# Altium PCB SMT 2inch printer V01 260904.PcbDoc
Units mil, origin at the board's own origin, x right, y up, seen from the top; angles counter-clockwise.
Board outline 2278.2 x 1816 mil, 2 copper layers (Top Layer, Bottom Layer); 60 components, 55 nets, 229 pads, 137 vias.
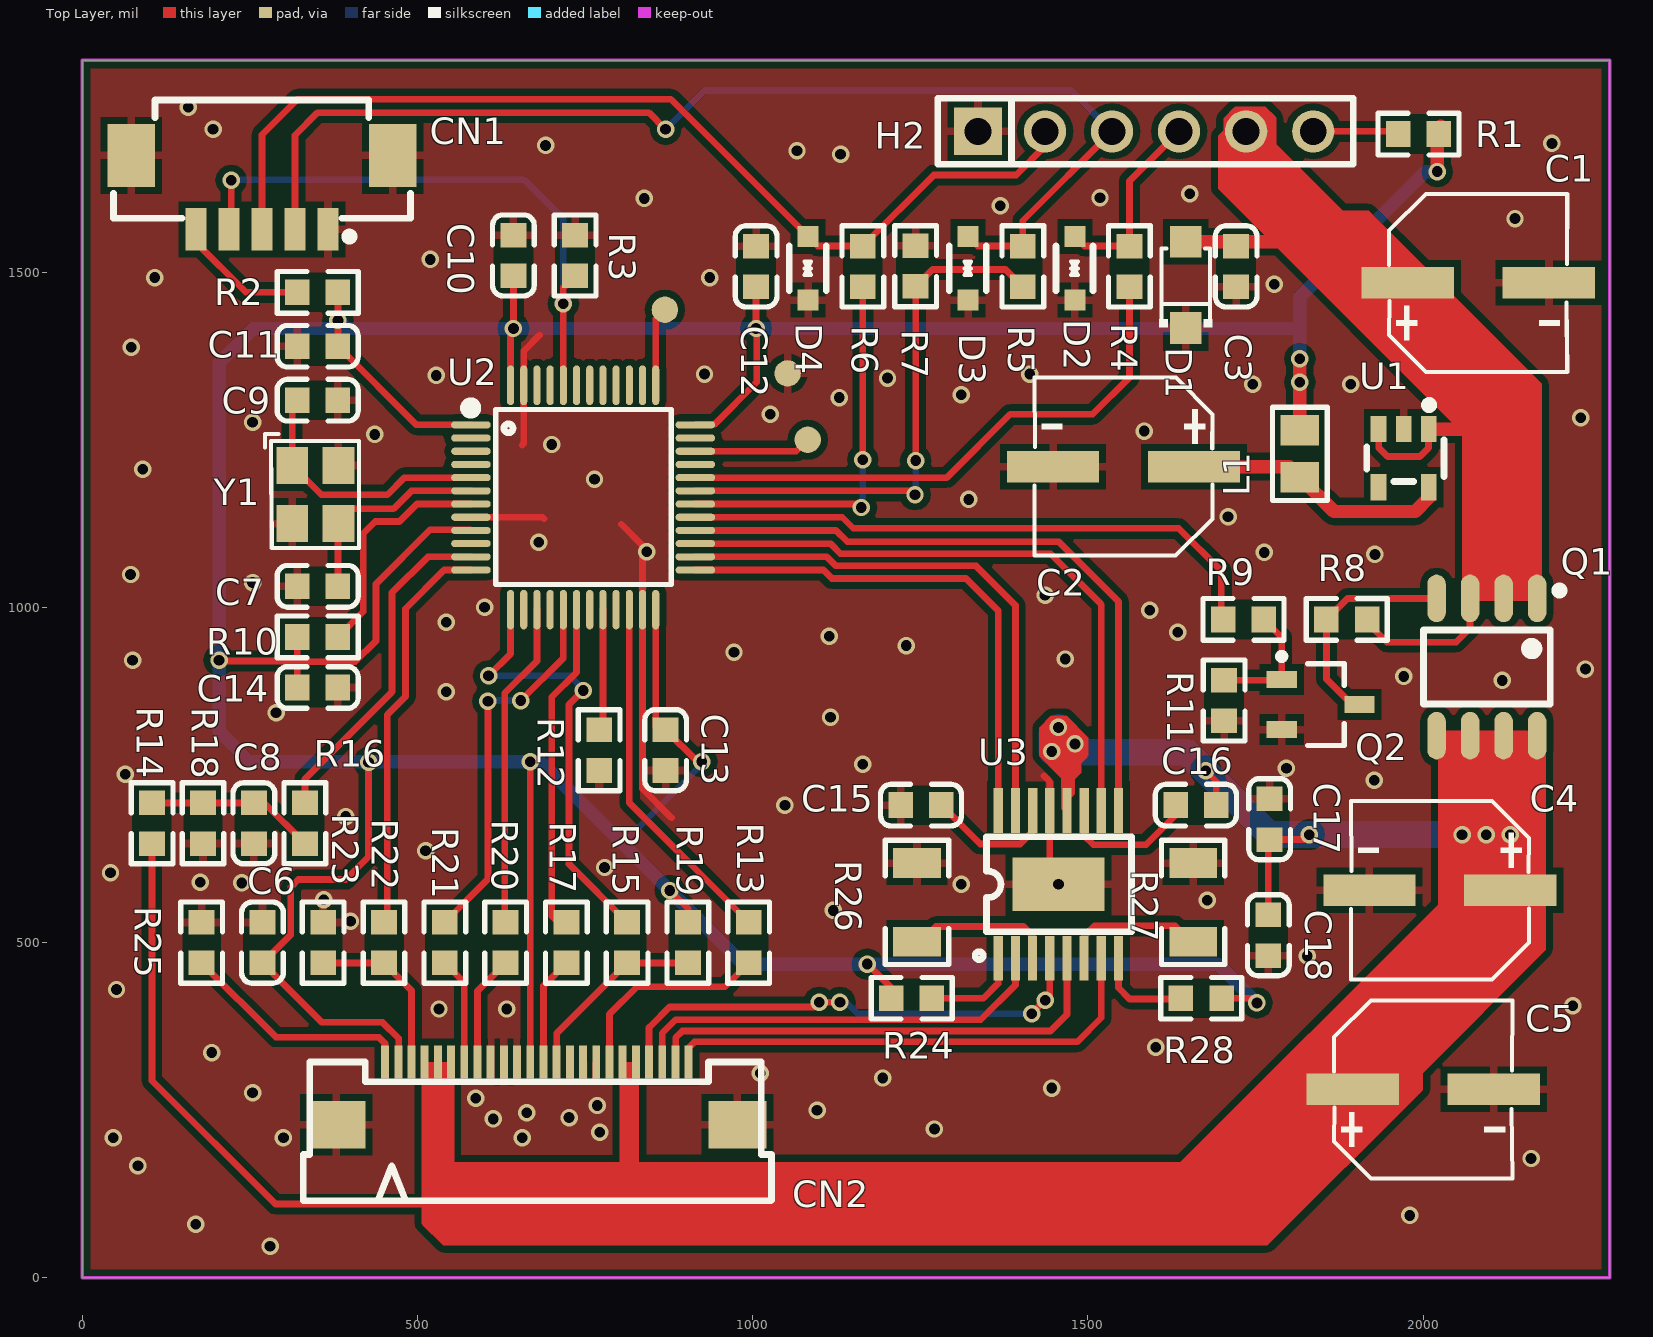
[diagram p0: Top Layer view]
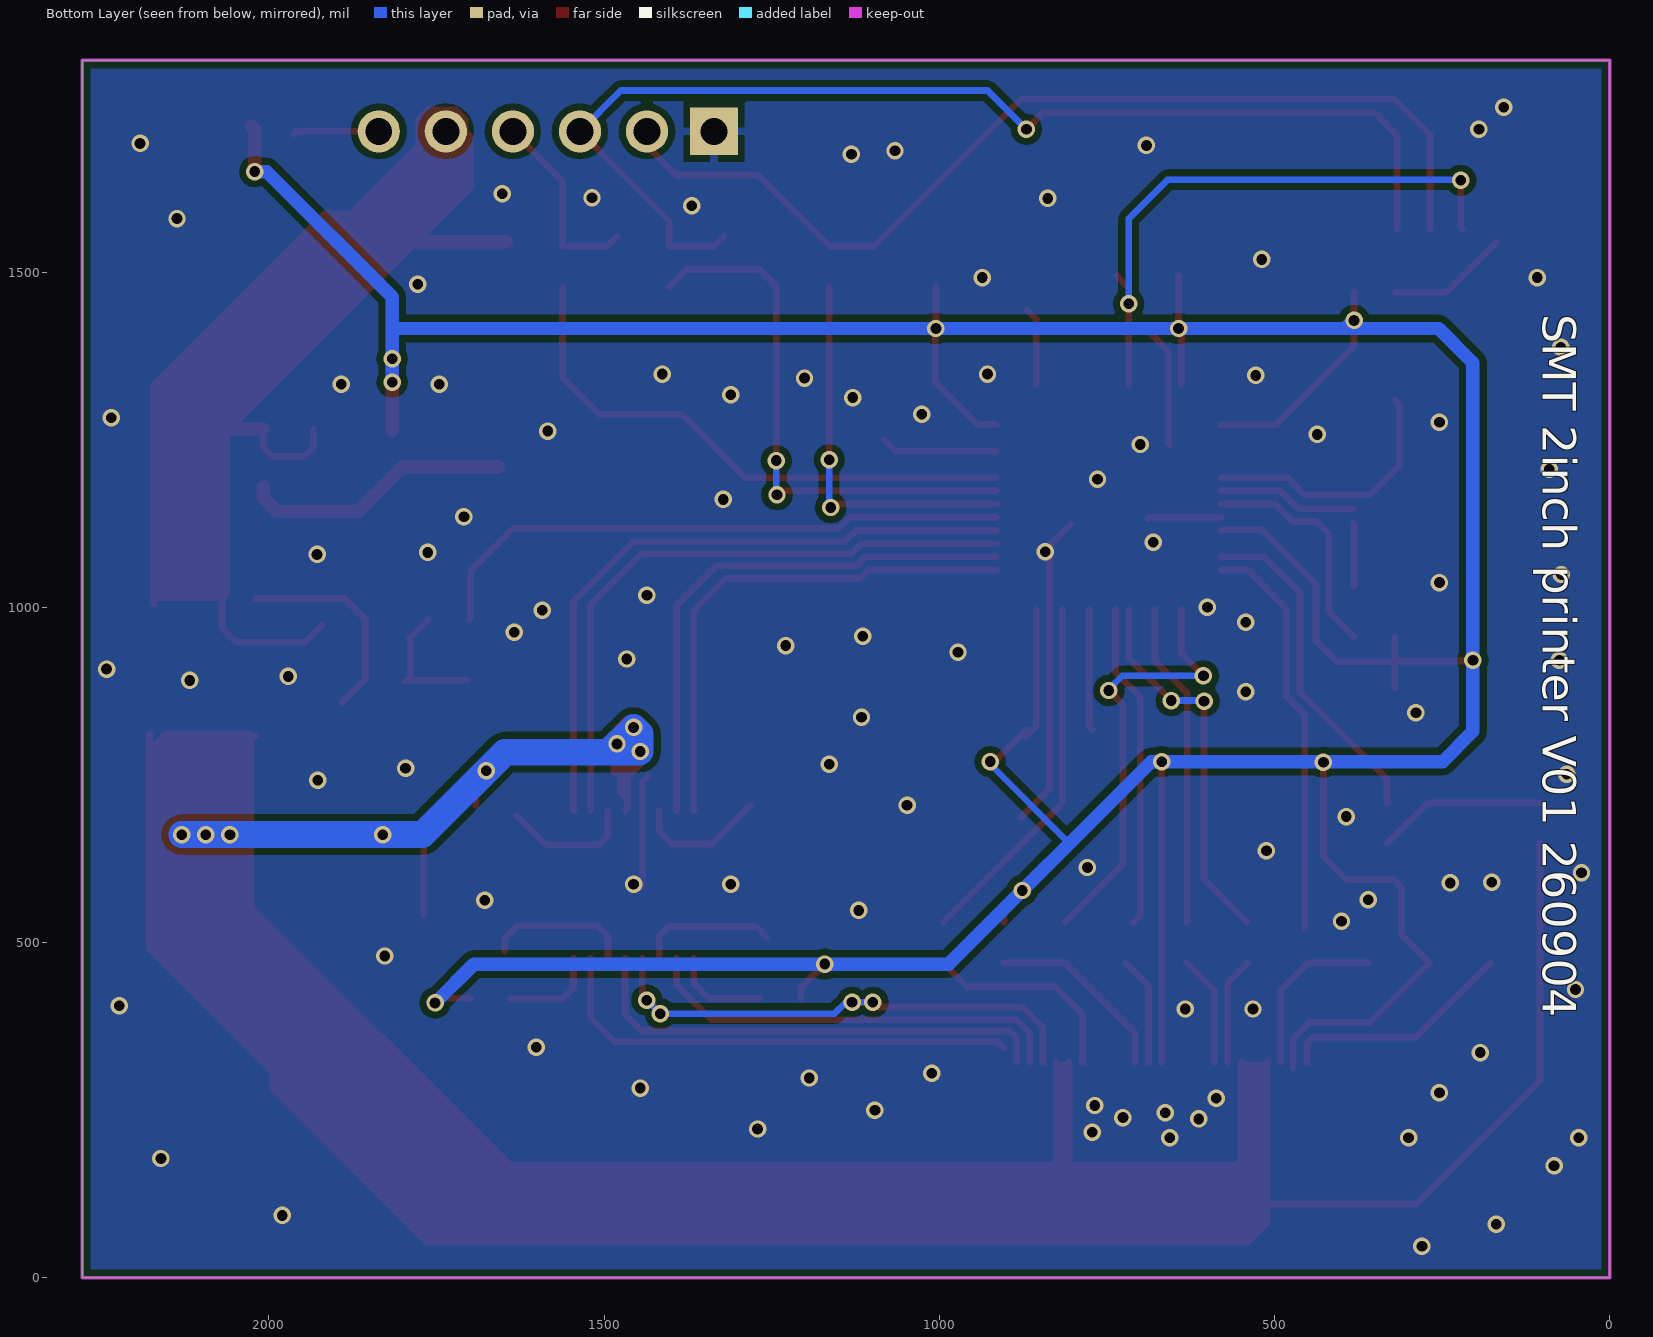
[diagram p1: Bottom Layer view, seen from below]

## Layer stack, top to bottom
Top Layer: signal copper 1.4
Dielectric: dielectric 12.6, FR-4, Dk 4.8
Bottom Layer: signal copper 1.4

## Board outline
0,0 2278.2,0 2278.2,1816 0,1816

## Design rules (kind name [scope] priority, off if disabled: settings)
Clearance Clearance_1 [All vs InNet('GND')] p1: gap=10
Clearance [All] p2: gap=6
ComponentClearance [All] p1 off: gap=10 collisioncheckmode=3 verticalgap=10
DiffPairsRouting DiffPair_DiffPairsRouting [InDifferentialPair ('NewDifferentialPair1')] p1: maxlimit=10 minlimit=10 mostfreqgap=10 maxuncoupledlength=500
DiffPairsRouting DiffPair_DiffPairsRouting_1 [InDifferentialPair ('NewDifferentialPair1')] p2: maxlimit=5 minlimit=5 mostfreqgap=5 maxuncoupledlength=500
DiffPairsRouting DiffPair_DiffPairsRouting_2 [InDifferentialPair ('NewDifferentialPair1')] p3: maxlimit=10 minlimit=10 mostfreqgap=10 maxuncoupledlength=500
DiffPairsRouting DiffPairsRouting_2 [InDifferentialPair ('NewDifferentialPair1')] p4: maxlimit=10 minlimit=10 mostfreqgap=10 maxuncoupledlength=500
DiffPairsRouting DiffPair_DiffPairsRouting_3 [InDifferentialPair ('NewDifferentialPair1')] p5: maxlimit=10 minlimit=10 mostfreqgap=10 maxuncoupledlength=500
DiffPairsRouting DiffPairsRouting_1 [InDifferentialPair ('NewDifferentialPair1')] p6: maxlimit=10 minlimit=10 mostfreqgap=10 maxuncoupledlength=500
DiffPairsRouting [All] p7: maxlimit=10 minlimit=10 mostfreqgap=10 maxuncoupledlength=500
MatchedLengths DiffPair_MatchedLengths [InDifferentialPair ('NewDifferentialPair1')] p1: tolerance=10000 checknetsindiffpair=TRUE checkdiffpairvsdiffpair=TRUE checkothers=TRUE
MatchedLengths DiffPair_MatchedLengths_1 [InDifferentialPair ('NewDifferentialPair1')] p2: tolerance=10000 checknetsindiffpair=TRUE checkdiffpairvsdiffpair=TRUE checkothers=TRUE
MatchedLengths DiffPair_MatchedLengths_2 [InDifferentialPair ('NewDifferentialPair1')] p3: tolerance=10000 checknetsindiffpair=TRUE checkdiffpairvsdiffpair=TRUE checkothers=TRUE
MatchedLengths MatchedLengths_1 [InDifferentialPair ('NewDifferentialPair1')] p4: tolerance=1000 checknetsindiffpair=TRUE checkdiffpairvsdiffpair=TRUE checkothers=TRUE
MatchedLengths DiffPair_MatchedLengths_3 [InDifferentialPair ('NewDifferentialPair1')] p5: tolerance=10000 checknetsindiffpair=TRUE checkdiffpairvsdiffpair=TRUE checkothers=TRUE
MatchedLengths [InDifferentialPair ('NewDifferentialPair1')] p6: tolerance=1000 checknetsindiffpair=TRUE checkdiffpairvsdiffpair=TRUE checkothers=TRUE
PolygonConnect PolygonConnect_1 [InNet('GND') vs IsVia] p1: connectstyle=Direct reliefconductorwidth=10 reliefentries=4 polygonreliefangle="90 Angle"
PolygonConnect [All] p2: connectstyle=Relief reliefconductorwidth=12 reliefentries=4 polygonreliefangle="90 Angle"
RoutingVias [All] p1: holewidth=16 width=26 viastyle="Through Hole" minholewidth=16 minwidth=24 maxholewidth=50 maxwidth=100
SolderMaskExpansion [All] p1: expansion=4
TestPointUsage [All] p1: valid=0 allowmultiple=FALSE
Testpoint [All] p1: side=15 testpointundercomponent=TRUE minsize=40 maxsize=100 preferedsize=60 minholesize=0 maxholesize=40 preferedholesize=32 testpointgrid=1 style=1023 order=0123456789
Width DiffPair_Width [InDifferentialPair('NewDifferentialPair1')] p1: maxlimit=5 minlimit=5 preferedwidth=5
Width DiffPair_Width_1 [InDifferentialPair('NewDifferentialPair1')] p2: maxlimit=5 minlimit=5 preferedwidth=5
Width DiffPair_Width_2 [InDifferentialPair('NewDifferentialPair1')] p3: maxlimit=5 minlimit=5 preferedwidth=5
Width Width_2 [InDifferentialPair('NewDifferentialPair1')] p4: maxlimit=10 minlimit=10 preferedwidth=10
Width DiffPair_Width_3 [InDifferentialPair('NewDifferentialPair1')] p5: maxlimit=5 minlimit=5 preferedwidth=5
Width Width_1 [InDifferentialPair('NewDifferentialPair1')] p6: maxlimit=10 minlimit=10 preferedwidth=10
Width [All] p7: maxlimit=100 minlimit=2 preferedwidth=6
17 further rules are at their usual default settings.

## Components (designator, comment, footprint, x,y, rotation, side; value= is the part's Value field where it differs from the comment)
C1 "47uF" CAP-SMD_BD6.3-L6.6-W6.6-FD 2082,1484 r0 top
C2 "47uF" CAP-SMD_BD6.3-L6.6-W6.6-FD 1553,1210 r180 top
C3 "100nF" 0603_C 1721,1508.62 r270 top
C4 "100uF" CAP-SMD_BD6.3-L6.6-W6.6-FD 2025,578 r180 top
C5 "100uF" CAP-SMD_BD6.3-L6.6-W6.6-FD 2000,281 r0 top
C6 "100nF" 0603_C 268.67,500 r270 top
C7 "20pF" 0603_C 351,1031.5 r0 top
C8 "470pF" 0603_C 256,678 r90 top
C9 "20pF" 0603_C 351,1309 r180 top
C10 "100nF" 0603_C 643,1525 r270 top
C11 "100nF" 0603_C 351,1389.5 r0 top
C12 "100nF" 0603_C 1005,1508.62 r270 top
C13 "100nF" 0603_C 870,787 r90 top
C14 "100nF" 0603_C 351,880.5 r180 top
C15 "2.2uF" 0603_C 1251,705 r180 top
C16 "10nF" 0603_C 1661,705 r0 top
C17 "10uF" 0603_C 1771,684 r270 top
C18 "100nF" 0603_C 1769,511 r90 top
CN1 "mx1.25mm-5p-wt" CONN-SMD_5P-P1.25_MX1.25MM-5P-WT 268,1619 r180 top
CN2 "24P05/上接" FPC-SMD_24P-P0.50_F0500WR-S-24PNLNG1GB0R 678,275 r0 top
D1 "SMF6.0A" SOD-123FL_L2.7-W1.8-LS3.8-RD 1645.87,1481 r90 top
D2 "H5VLD3B" SOD-323_L1.7-W1.3-LS2.5-BI 1480.39,1505.84 r90 top
D3 "H5VLD3B" SOD-323_L1.7-W1.3-LS2.5-BI 1321.28,1505.84 r90 top
D4 "H5VLD3B" SOD-323_L1.7-W1.3-LS2.5-BI 1082.62,1505.84 r90 top
H2 "lail-pz2.54-6p-l" HDR-TH_6P-P2.54-V-F 1586,1710 r0 top
L1 "BLM18AG601SN1D" 0805_L 1816,1229 r90 top
Q1 "NCE30P12S" SOIC-8_150mil 2095,911 r180 top
Q2 "AO3402" SOT-23-3L 1847,855 r180 top
R1 "10KΩ" 0603_R 1993,1706 r0 top
R2 "1KΩ" 0603_R 351,1470 r0 top
R3 "10KΩ" 0603_R 735,1525 r90 top
R4 "20Ω" 0603_R 1561.89,1508.62 r270 top
R5 "20Ω" 0603_R 1402.78,1508.62 r270 top
R6 "20Ω" 0603_R 1164.11,1508.62 r270 top
R7 "10KΩ" 0603_R 1243,1509 r270 top
R8 "47KΩ" 0603_R 1886,982 r0 top
R9 "1KΩ" 0603_R 1732,982 r180 top
R10 "10KΩ" 0603_R 351,956 r0 top
R11 "47KΩ" 0603_R 1703,861 r270 top
R12 "10KΩ" 0603_R 771,787 r90 top
R13 "100Ω" 0603_R 994,500 r90 top
R14 "47KΩ" 0603_R 104,678 r90 top
R15 "100Ω" 0603_R 812.67,500 r90 top
R16 "1KΩ" 0603_R 332,678 r270 top
R17 "100Ω" 0603_R 722,500 r90 top
R18 "47KΩ" 0603_R 180,678 r270 top
R19 "56KΩ" 0603_R 903.33,500 r90 top
R20 "100Ω" 0603_R 631.33,500 r90 top
R21 "100Ω" 0603_R 540.67,500 r90 top
R22 "100Ω" 0603_R 450,500 r90 top
R23 "30KΩ" 0603_R 359.33,500 r90 top
R24 "10KΩ" 0603_R 1237,417 r180 top
R25 "220Ω" 0603_R 178,500 r270 top
R26 "0.4Ω 1%" 1206_R 1245,560 r90 top
R27 "0.4Ω 1%" 1206_R 1657,560 r90 top
R28 "10KΩ" 0603_R 1669,417 r0 top
U1 "TLV75733PDBVR" SOT-23-5 1976,1231 r90 top
U2 "MH2103CCCT6" LQFP-48_L7.0-W7.0-P0.50-LS9.0-BL 747,1164 r270 top locked
U3 "PT5139-HT-TP" HTSSOP-16_L5.0-W4.4-P0.65-LS6.4-BL-EP 1456,587 r0 top
Y1 "8MHz" XT_3225_4 337.56,1178.31 r270 top

## Footprints (in the part's own frame and the unit in brackets; to place one, negate y for a bottom-side part, rotate by r counter-clockwise, add the part's x,y. Pads: shape width x height; smd on the part's side, far side on the other; paste and mask are expansions set on the pad)
0603_C [mm]
  rect 0.93x0.98 smd: 1(-0.77,0) 2(0.77,0)
  silkscreen extent -1.53,-0.79 1.54,0.79, body extent -0.8,-0.4 0.8,0.4, height 0.3
0603_R [mm]
  rect 0.93x0.98 smd: 1(-0.77,0) 2(0.77,0)
  silkscreen extent -1.53,-0.79 1.54,0.79, body extent -0.85,-0.4 0.85,0.4, height 0.56
0805_L [mm]
  rect 1.16x1.47 smd: 1(-0.89,0) 2(0.89,0)
  silkscreen extent -1.77,-1.04 1.77,1.03, body extent -1.02,-0.64 1.03,0.64, height 0.6
1206_R [mm]
  rect 1.13x1.8 smd: 1(-1.49,0) 2(1.49,0)
  silkscreen extent -2.36,-1.2 2.35,1.2, body extent -1.7,-0.86 1.65,0.87, height 0.85
CAP-SMD_BD6.3-L6.6-W6.6-FD [mil]
  rect 137.8x47.2 smd: 1(-105.1,0) 2(105.1,0)
  silkscreen extent -133,-133 133,133
CONN-SMD_5P-P1.25_MX1.25MM-5P-WT [mm]
  rect 0.8x1.6 smd: 1(-2.5,1.4) 2(-1.25,1.4) 3(0,1.4) 4(1.25,1.4) 5(2.5,1.4)
  rect 1.8x2.4 smd: 6(4.95,-1.4) 7(-4.95,-1.4)
  silkscreen extent -5.63,-3.5 5.63,1.82
FPC-SMD_24P-P0.50_F0500WR-S-24PNLNG1GB0R [mm]
  rect 0.3x1.25 smd: 1(-5.75,1.187) 2(-5.25,1.187) 3(-4.75,1.187) 4(-4.25,1.187) 5(-3.75,1.187) 6(-3.25,1.187) 7(-2.75,1.187) 8(-2.25,1.187) 9(-1.75,1.187) 10(-1.25,1.187) 11(-0.75,1.187) 12(-0.25,1.187) 13(0.25,1.187) 14(0.75,1.187) 15(1.25,1.187) 16(1.75,1.187) 17(2.25,1.187) 18(2.75,1.187) 19(3.25,1.187) 20(3.75,1.187) 21(4.25,1.187) 22(4.75,1.187) 23(5.25,1.187) 24(5.75,1.187)
  rect 2.202x1.798 smd: 25(7.6,-1.187) 26(-7.6,-1.187)
  silkscreen extent -8.85,-4.06 8.89,1.19
HDR-TH_6P-P2.54-V-F [mm]
  rect 1.8x1.8 hole 1.02: 1(-6.35,0)
  round 1.6 hole 1.02: 2(-3.81,0) 3(-1.27,0) 4(1.27,0) 5(3.81,0) 6(6.35,0)
  silkscreen extent -7.87,-1.25 7.87,1.25
HTSSOP-16_L5.0-W4.4-P0.65-LS6.4-BL-EP [mm]
  rect 0.35x1.7 smd: 1(-2.28,-2.804) 2(-1.629,-2.804) 3(-0.979,-2.804) 4(-0.329,-2.804) 5(0.321,-2.804) 6(0.971,-2.804) 7(1.621,-2.804) 8(2.271,-2.804) 9(2.272,2.796) 10(1.624,2.796) 11(0.974,2.796) 12(0.324,2.796) 13(-0.326,2.796) 14(-0.977,2.796) 15(-1.627,2.796) 16(-2.277,2.796)
  rect 3.5x2.032 smd: 17(0,0)
  silkscreen extent -3.15,-2.85 2.77,1.8
LQFP-48_L7.0-W7.0-P0.50-LS9.0-BL [mm]
  oval 0.27x1.5 smd: 1(-2.75,-4.25) 2(-2.25,-4.25) 3(-1.75,-4.25) 4(-1.25,-4.25) 5(-0.75,-4.25) 6(-0.25,-4.25) 7(0.25,-4.25) 8(0.75,-4.25) 9(1.25,-4.25) 10(1.75,-4.25) 11(2.25,-4.25) 12(2.75,-4.25) 25(2.75,4.25) 26(2.25,4.25) 27(1.75,4.25) 28(1.25,4.25) 29(0.75,4.25) 30(0.25,4.25) 31(-0.25,4.25) 32(-0.75,4.25) 33(-1.25,4.25) 34(-1.75,4.25) 35(-2.25,4.25) 36(-2.75,4.25)
  oval 1.5x0.27 smd: 13(4.25,-2.75) 14(4.25,-2.25) 15(4.25,-1.75) 16(4.25,-1.25) 17(4.25,-0.75) 18(4.25,-0.25) 19(4.25,0.25) 20(4.25,0.75) 21(4.25,1.25) 22(4.25,1.75) 23(4.25,2.25) 24(4.25,2.75) 37(-4.25,2.75) 38(-4.25,2.25) 39(-4.25,1.75) 40(-4.25,1.25) 41(-4.25,0.75) 42(-4.25,0.25) 43(-4.25,-0.25) 44(-4.25,-0.75) 45(-4.25,-1.25) 46(-4.25,-1.75) 47(-4.25,-2.25) 48(-4.25,-2.75)
  silkscreen extent -3.59,-4.46 3.3,3.34
SOD-123FL_L2.7-W1.8-LS3.8-RD [mm]
  rect 1.2x1.2 smd: 1(-1.635,0) 2(1.635,0)
  silkscreen extent -1.6,-1 1.38,1
SOD-323_L1.7-W1.3-LS2.5-BI [mil]
  rect 31.5x31.5 smd: 1(-47.5,0) 2(47.4,0)
  silkscreen extent -34,-27 33,28
SOIC-8_150mil [mm]
  oval 0.7x1.8 smd: 1(-1.905,-2.6) 2(-0.635,-2.6) 3(0.635,-2.6) 4(1.905,-2.6) 5(1.905,2.6) 6(0.635,2.6) 7(-0.635,2.6) 8(-1.905,2.6)
  silkscreen extent -2.9,-3.05 2.4,1.4
SOT-23-3L [mm] "http://www.aosmd.com/res/packaging_information/SOT-23-3L.pdf"
  rect 1.15x0.65 smd: 1(1.475,-0.95) 2(1.475,0.95) 3(-1.475,0)
  silkscreen extent -0.9,-1.95 1.6,1.55
SOT-23-5 [mm]
  rect 1x0.6 smd paste+0 mask+0.05: 1(0.889,-0.823) 2(0.889,0.127) 3(0.889,1.077) 4(-1.311,1.077) 5(-1.311,-0.823)
  silkscreen extent -1.1,-1.4 1.95,1.52
XT_3225_4 [mm]
  rect 1.4x1.2 smd: 1(-0.846,-0.621) 2(1.354,-0.621) 3(1.354,1.129) 4(-0.846,1.129)
  silkscreen extent -2.03,-1.65 2.29,1.91

## Part data
C1 C2 C4 C5: library part 10uF
C3 C6 C8 C10 C11 C12 C13 C14 C18: library part "0603 100nF (104) 10% 50V", "贴片电容"
C7 C9: library part "0603 10pF (100) 5% 50V", "贴片电容"
C15: library part "0805 2.2uF (225) 20% 50V", "贴片电容"
C16: library part "0603 10nF (103) 10% 50V", "贴片电容"
C17: library part "0805 10uF (106) 10% 25V", "贴片电容"
D1: library part "SOD-323 1N4148WS T4", "稳压二极管"
D2 D3 D4: library part PESD5V0S1BA_C2827694
L1 R1 R2 R3 R7 R10 R11 R12 R14 R18: library part "0603 4.7KΩ (4701) 1%", "贴片电阻"
Q1: library part AO4407A, "MOS(场效应管)"
Q2: library part "AO3402A N道沟 X0YV1T SOT-23", "MOS(场效应管)"
R4 R5 R6: library part "0603 100Ω (1000) 1%", "贴片电阻"
R8: library part "0603 47KΩ (4702) 1%", "贴片电阻"
R9 R16: library part "0603 470Ω (4700) 1%", "贴片电阻"
R13 R15 R17 R19 R20 R21 R22 R24 R28: library part "0603 10KΩ (1002) 1%", "贴片电阻"
R23: library part "0603 30KΩ (3002) 1%", "贴片电阻"
R25: library part "0603 200Ω (2000) 1%", "贴片电阻"
R26 R27: library part Res, "Resistor"
U2: library part stm32f103c8t6
Y1: library part XTAL_4, "Crystal Oscillator"

## Free pads (board coordinates)
  round 39.37 smd: 0(1082,1250) 1(1052,1349) 2(869,1444)

## Via types
v1: diameter 26, hole 16, Top Layer to Bottom Layer, 137 vias

## Nets (pads, with @x,y where several pads share a name; then routed paths per layer and width w, separated by ;. In a path a pad name is that pad's centre, name@x,y a point inside that pad or via, vN(x,y) a via of type N, cw(c..) or ccw(c..) an arc to the next point about the centre after c; other vN are vias at no path point)
ADC_PAPER: R22.2 U2.12 | length 609.8
  Top Layer w10: R22.2@455,521 455,840 482,867 482,998 539.73,1055.73 U2.12
ADC_TM: R15.2 U2.13 | length 653.8
  Top Layer w10: v1(606,898) 638.73,930.73 U2.13 ; v1(747,876) 726,855 726,616.98 R15.2
  Bottom Layer w10: v1(606,898) 727,898 747,878 v1(747,876)
ADC_VH: R16.1 U2.11 | length 507.3
  Top Layer w10: R16.1 332,744 462,874 462,1022 515.42,1075.42 U2.11
BOOT0: CN1.4 R3.1 U2.44 | length 891.7
  Top Layer w10: CN1.4 222,1567.1 v1(222,1637) ; U2.44 717.47,1477.16 R3.1
  Bottom Layer w10: v1(222,1637) 223,1638 659,1638 717.47,1579.53 v1(717.47,1453)
BOOT1: R12.2 U2.20 | length 181.7
  Top Layer w10: R12.2 776.53,822.84 U2.20
DTR: R4.2 U2.32 | length 844.9
  Top Layer w10: U2.32 1289.53,1193.53 1384,1288 1507,1288 1561.89,1342.89 R4.2
EN_VH: R9.2 U2.29 | length 891.1
  Top Layer w10: U2.29 1133.53,1134.47 1150,1118 1635,1118 1699,1054 1699,984.68 R9.2
GND: C1.2 C2.2 C3.2 C4.2 C5.2 C6.1 C7.1 C8.1 C9.1 C10.1 C11.1 C12.1 C13.1 C14.1 C15.2 C17.1 C18.1 CN1.1 CN1.6 CN1.7 CN2.9 CN2.10 CN2.11 CN2.15 CN2.16 CN2.17 CN2.25 CN2.26 D1.1 D2.1 D3.1 D4.1 H2.1 pad.1 Q2.2 R3.2 R7.1 R11.2 R12.1 R18.2 R23.2 R25.1 R26.2 R27.2 U1.2 U2.8 U2.23 U2.47 U3.13 U3.17 Y1.2 Y1.4 | length 926.2
  Top Layer w10: U2.8 686.53,1134.47 689,1132 ; 656,1242 658.42,1244.42 U2.47 658.42,1382.42 682,1406 ; 804,1124 835.58,1092.42 U2.23 835.58,729.42 879,686 ; 1434,749 1443.15,739.85 U3.13 1443.15,584.85 U3.17@1446,582
  other v1: 280,47 169,80 1980,93 83,167 2161,178 46,209 300,209 656,209 772,217 1271,222 613,237 726,239 663,246 1096,250 768,257 587,268 254,276 1446,283 1194,298 1011,305 193,336 1601,344 532,401 633,401 2223,406 51,430 1827,480 400,532 1120,548 1678,563 360,564 1311,587 1456,587 238,589 176,590 42,604 779,612 779,612 512,637 393,688 1048,705 1927,742 64,751 1796,760 1164,766 1116,836 289,843 543,874 2118,891 1971,897 2242,908 75,921 1466,923 972,933 1229,943 1114,957 1634,963 543,978 1592.07,995.81 600,1000 1436,1018 254,1037 72,1049 1928,1079 1763,1082 842,1083 681,1097 1709,1135 1322,1161 764,1191 90,1206 700,1243 436,1258 1584,1263 254,1276 2235,1283 1026,1288 1129,1313 1311,1317 1746,1333 1892,1333 1201,1342 528,1346 928,1348 1413,1348 73,1388 1778,1482 108,1492 936,1492 519,1519 2137,1580 1369,1599 838,1610 1518,1611 1652,1617 1131,1676 1066,1681 691,1689 2192,1692 195,1713 158,1746
MOTOM_A: U2.25 U3.16 | length 774.9
  Top Layer w10: U2.25 1105.27,1055.73 1118,1043 1318,1043 1366.35,994.65 U3.16
MOTOM_A\: U2.26 U3.15 | length 813.6
  Top Layer w10: U2.26 1110.58,1075.42 1124,1062 1333,1062 1391.95,1003.05 U3.15
MOTOM_B: U2.28 U3.9 | length 986.6
  Top Layer w10: U2.28 1124.21,1114.79 1141,1098 1456,1098 1545.45,1008.55 U3.9
MOTOM_B\: U2.27 U3.10 | length 950.3
  Top Layer w10: U2.27 1115.9,1095.1 1131,1080 1444,1080 1519.95,1004.05 U3.10
MOTOR_A: CN2.22 U3.2 | length 639.6
  Top Layer w10: CN2.22 865,365 885,385 1340,385 1391.87,436.87 U3.2
MOTOR_A\: CN2.21 U3.4 | length 798.1
  Top Layer w10: CN2.21 845.33,373.32 848,376 876,404 1047,404 1092,404 v1(1099,411) v1(1130,411) ; v1(1416,394) 1443.05,421.05 U3.4
  Bottom Layer w10: v1(1099,411) 1139,411 1156,394 v1(1416,394) v1(1436.1,414.1)
MOTOR_B: CN2.24 U3.7 | length 723.2
  Top Layer w10: CN2.24@904,343 913,352 1484,352 1519.82,387.82 U3.7
MOTOR_B\: CN2.23 U3.5 | length 718.3
  Top Layer w10: CN2.23 885,322.06 885,358 895,368 1444,368 1468.64,392.64 U3.5
NetC2_1: C2.1 L1.1 U1.5 | length 402.5
  Top Layer w20: C2.1 1799.96,1210 L1.1 1866.96,1143 1988,1143 2008.4,1163.4 U1.5
NetC8_2: C8.2 R14.2 R16.2 R18.1 | length 253.1
  Top Layer w10: R14.2 C8.2 271.37,708.31 R16.2
NetC15_1: C15.1 U3.14 | length 199.5
  Top Layer w10: C15.1 1339.32,647 1399,647 1417.55,665.55 U3.14
NetC16_1: C16.1 U3.11 | length 197.6
  Top Layer w10: U3.11 1494.35,659.65 1508,646 1586.68,646 C16.1@1630.68,690
NetCN1_5: CN1.5 R2.1 | length 182.8
  Top Layer w10: CN1.5@169,1545 244,1470 R2.1
NetCN2_1: CN2.1 R25.2 | length 351.1
  Top Layer w10: R25.2 288.68,359 442,359 451.62,349.38 CN2.1
NetCN2_3: CN2.3 R22.1 R23.1 | length 255.6
  Top Layer w10: R23.1 R22.1 491,428.69 CN2.3
NetCN2_7: CN2.7 R21.1 | length 160
  Top Layer w10: R21.1 569.74,440.62 CN2.7
NetCN2_8: CN2.8 R20.1 | length 165.3
  Top Layer w10: CN2.8 589.42,427.77 R20.1
NetCN2_13: CN2.13 R17.1 | length 162.1
  Top Layer w10: CN2.13 687.84,435.53 R17.1
NetCN2_14: CN2.14 R15.1 R19.1 | length 282.2
  Top Layer w10: CN2.14 707.52,364.54 R15.1 R19.1
NetCN2_18: CN2.18 R13.1 | length 310.9
  Top Layer w10: CN2.18 786.26,393.27 827,434 958.31,434 R13.1
NetD2_2: D2.2 H2.4 R4.1 | length 289.2
  Top Layer w10: D2.2 1494.7,1538.94 R4.1 1561.89,1635.89 H2.4
NetD3_2: CN1.2 D3.2 H2.3 R5.1 | length 1746.4
  Top Layer w10: CN1.2 317.22,1704.22 351,1738 845,1738 v1(870,1713) ; D3.2 1335.59,1538.94 R5.1 1402.78,1576.78 H2.3
  Bottom Layer w10: v1(870,1713) 928,1771 1475,1771 H2.3
NetD4_2: CN1.3 D4.2 H2.2 R6.1 | length 1505.5
  Top Layer w10: CN1.3 268.01,1705.01 321,1758 877.86,1758 1096.92,1538.94 R6.1 1270.17,1645 1393,1645 1436,1688 H2.2
NetH2_6: H2.6 R1.1 | length 128.3
  Top Layer w10: H2.6 1958.69,1710 R1.1
NetQ1_4: Q1.4 Q2.3 R8.1 | length 315.9
  Top Layer w10: Q2.3@1891,858 1855.69,893.31 R8.1 1887.05,1013.36 Q1.4
NetQ2_1: Q2.1 R9.1 R11.1 | length 195.6
  Top Layer w10: R11.1 1794.69,891.31 Q2.1@1797,889 ; R9.1 1788.93,955.39 Q2.1
NetR24_1: R24.1 U3.1 | length 145.5
  Top Layer w10: R24.1 1344,417 1366,439 1366,476.36 U3.1
NetR26_1: R26.1 U3.3 | length 205.2
  Top Layer w10: R26.1@1258,509 1273,524 1404,524 1417.46,510.54 U3.3
NetR27_1: R27.1 U3.6 | length 220.4
  Top Layer w10: U3.6 1494.23,509.23 1510,525 1630,525 1648,507 R27.1@1648,487
NetR28_1: R28.1 U3.8 | length 144.6
  Top Layer w10: U3.8 1545.41,432.59 1562,416 1637.69,416 R28.1
NRST: R10.2 U2.7 | length 348.6
  Top Layer w10: R10.2 419,993.68 419,1048 419,1110 437,1128 473,1128 498,1153 499.16,1154.16 U2.7
OSC_IN: C9.2 U2.5 Y1.1 | length 395.7
  Top Layer w10: C9.2 313.1,1301.41 Y1.1 356.72,1168 455,1168 480.53,1193.53 U2.5
OSC_OUT: C7.2 U2.6 Y1.3 | length 302
  Top Layer w10: C7.2 381.32,1124.31 Y1.3 ; Y1.3@383,1146 384,1147 464,1147 490.84,1173.84 U2.6
RXD: R5.2 R7.2 U2.31 | length 828.9
  Top Layer w10: U2.31 1236.16,1173.84 v1(1242,1168) ; v1(1243,1219) 1244,1218 1244,1216 1243,1217 R7.2 1268.32,1504 1377.08,1504 R5.2
  Bottom Layer w10: v1(1242,1168) 1243,1169 v1(1243,1219)
STB: R17.2 U2.18 | length 487.3
  Top Layer w10: R17.2@711,529.32 700,540.31 700,866 737.16,903.16 U2.18
TCK: pad.2 U2.37 | length 118.4
  Top Layer w10: U2.37 855.27,1430.27 pad.2
TMS: pad.0 U2.34 | length 174.8
  Top Layer w10: U2.34 1064.9,1232.9 pad.0
TPH_CLK: R20.2 U2.15 | length 486.8
  Top Layer w10: R20.2 630,531.65 630,872 678.1,920.1 U2.15
TPH_DI: R21.2 U2.17 | length 567.7
  Top Layer w10: R21.2 605,594.65 v1(605,860) ; v1(654,861) 717.47,924.47 U2.17
  Bottom Layer w10: v1(605,860) 606,861 v1(654,861)
TPH_DO: U2.16
TPH_LAT: R13.2 U2.22 | length 540.1
  Top Layer w10: U2.22 815.9,708.42 R13.2
TXD: R6.2 U2.30 | length 580.2
  Top Layer w10: U2.30 1156.84,1154.16 v1(1162,1149) ; v1@1164,1220 v1(1164.11,1220.11) R6.2
  Bottom Layer w10: v1(1162,1149) 1164.11,1151.11 v1(1164.11,1220.11)
VDC_IN: 
VDD_3V3: C6.2 C10.2 C11.2 C12.2 C13.2 C14.2 CN2.2 CN2.12 L1.2 R1.2 R2.2 R10.1 R19.2 R24.2 R28.2 U2.1 U2.9 U2.24 U2.36 U2.48 | length 7614.5
  Top Layer w10: v1(204,921) 205,921 206,920 320.69,920 ; C14.2 R10.1 ; 320.69,919 407,919 438,950 438,1035 519,1116 578.48,1116 U2.9 ; R2.2 C11.2 498.54,1272.27 U2.1 ; v1(427,769) 427,628 393,594 322,594 311,583 311,512.02 C6.2 357.35,381 448,381 472,357 CN2.2@472,313 ; U2.48 638.73,1411.73 v1(643,1416) ; v1@642,1415 642,1414 643,1415 C10.2 ; v1@668,770 v1(668.16,769.85) CN2.12 ; U2.24 855.27,822.73 C13.2@871,807 ; C13.2 917.32,770 v1(924,770) ; v1(876.25,577.75) 903.33,550.67 R19.2 ; U2.36 915.05,1273 943,1273 1006,1336 v1@1006,1416 ; v1(1005,1416) v1@1006,1416 ; C12.2 1005,1417 v1@1006,1416 ; v1(1171,468) 1206.68,432.32 R24.2 ; R28.2 1745,417 v1(1752,410)
  Top Layer w20: L1.2 v1(1816,1371) ; v1(2021,1650) 2021,1713 R1.2@2026,1718
  Bottom Layer w10: 806.03,647.97 924,765.94 v1(924,770)
  Bottom Layer w20: v1@381.32,1429 394.32,1416 ; v1(1752,410) 1694,468 986,468 684,770 249,770 204,815 204,1365 255,1416 1816,1416 ; v1(1816,1336) 1816,1463 2003,1650 v1(2021,1650)
  other v1: 381.32,1428
VDD_5V: 
VDD_IN: C1.1 C3.1 D1.2 H2.5 Q1.1 Q1.2 Q1.3 R8.2 U1.1 U1.3 | length 2528.8
  Top Layer w10: H2.5 H2.5@1707,1710 ; R8.2@1921,973 1946,948 2049,948 2070,969 Q1.3 2063,1020.36 2063,1262 1699,1626 1699,1702 H2.5@1707,1710 ; U1.3 1933.6,1238.4 1947,1225 1995,1225 2008,1238 2008,1265.61 U1.1 ; Q1.1@2172,1005 2172,1332 1917,1587 1878,1587 1776,1689 1776,1729 1763,1742 1721,1742 1707,1728 H2.5@1707,1710
  Top Layer w20: D1.2 1831.37,1545.37 1839,1553 ; U1.1 2090,1266 2094,1262
VH: C4.1 C5.1 C16.2 C17.2 C18.2 CN2.4 CN2.5 CN2.6 CN2.19 CN2.20 Q1.5 Q1.6 Q1.7 Q1.8 R14.1 U3.12 | length 7471.4
  Top Layer w10: R14.1 104,294 288,110 667,110 676,101 ; CN2.4 510.67,109.32 520,100 ; CN2.6 550.05,142.95 565,128 ; 797,117 805.95,125.95 CN2.19 ; CN2.20 825.64,110.36 836,100 ; U3.12@1465,713 1476,724 1476,746 1485,755 1485,769 1496,780 1496,804 1466,834 1447,834 1432,819 1432,780 1465,747 1465,700.83 U3.12 ; v1(1675.8,756.2) 1691.32,740.69 C16.2 ; C17.2@1768,661 1769,660 C18.2 ; C17.2 1822.68,653.69 v1(1830,661) ; Q1.5 2027,801.64 2027,555 1640,168 511,168 511,82 540,53 1766,53 1995,282 1995,308 2178,491 Q1.8@2178,811
  Bottom Layer w40: 1493,784 v1(1456,821) 1446,811 v1(1446,785) 1447,784 1648,784 1771,661 v1(2130,661)
  other v1: 2058,661 2094,661 1480.68,796.32
pads on no net: U1.4 U2.2 U2.3 U2.4 U2.10 U2.14 U2.19 U2.21 U2.33 U2.35 U2.38 U2.39 U2.40 U2.41 U2.42 U2.43 U2.45 U2.46

## Polygon pours and split planes (outlines as drawn)
GND on Top Layer "Top Layer-No Net" (solid, remove dead copper, pour order 1000): 0,-3 2279.2,-3 2279.2,1813 -1,1813 -1,-5
GND on Bottom Layer "Top Layer-No Net" (solid, remove dead copper, pour order 1001): 3,-1 2282.2,-1 2282.2,1815 2,1815 2,-3

## Keep-outs
Keep-Out Layer:
  the board outline again, w5

## Other copper
Top Layer:
  rectangle net VH: 805.95,110.36 825.64,321.75
  rectangle net VH: 510.67,161 550.05,321.75
  region net VH: 1465,747 1432,780 1432,819 1447,834 1466,834 1496,804 1496,780 1485,769 1485,755 1476,746 1476,724 1466,724 1465,725
  region net VH: 2025,816 2155,816 2178,793 2178,491 1995,308 1995,282 1766,53 540,53 510.67,82.32 510.67,167 1639,167 2027,555 2025,557
  region net VDD_IN: 1721,1742 1763,1742 1776,1729 1776,1689 1878,1587 1917,1587 2172,1332 2172,1010 2073.36,1010 2063,1020.36 2063,1262 1699,1626 1699,1702 1707,1710 1707,1728

## Silkscreen, mask and mechanical layers (free items; w line width, h text height)
Bottom Overlay:
  text "SMT 2inch printer V01 260904" at 100,1437 h50 r90